# EAGLE board power distribution pcb (EAGLE 6.2)
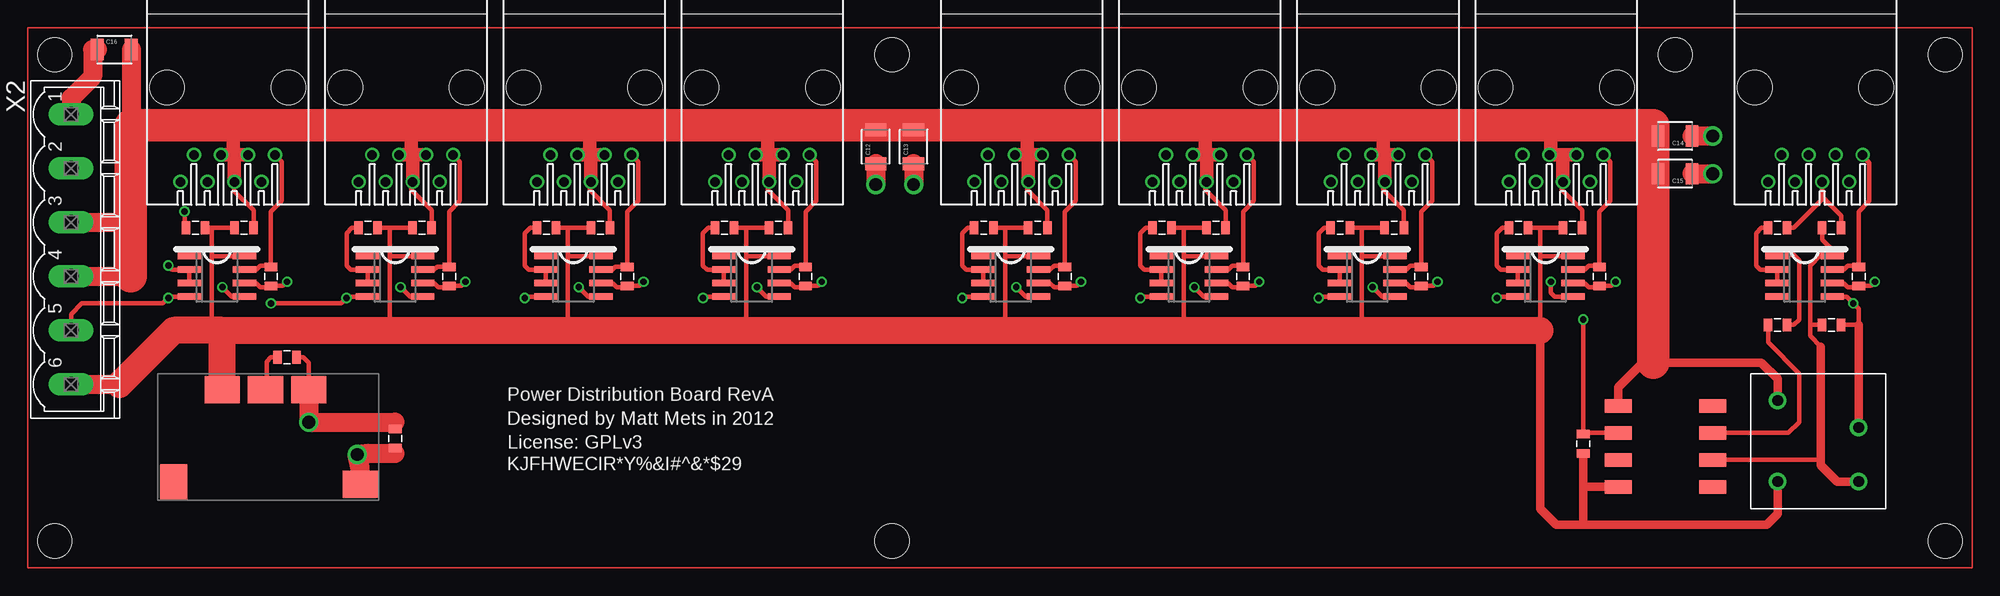
[diagram p0: board, top side]
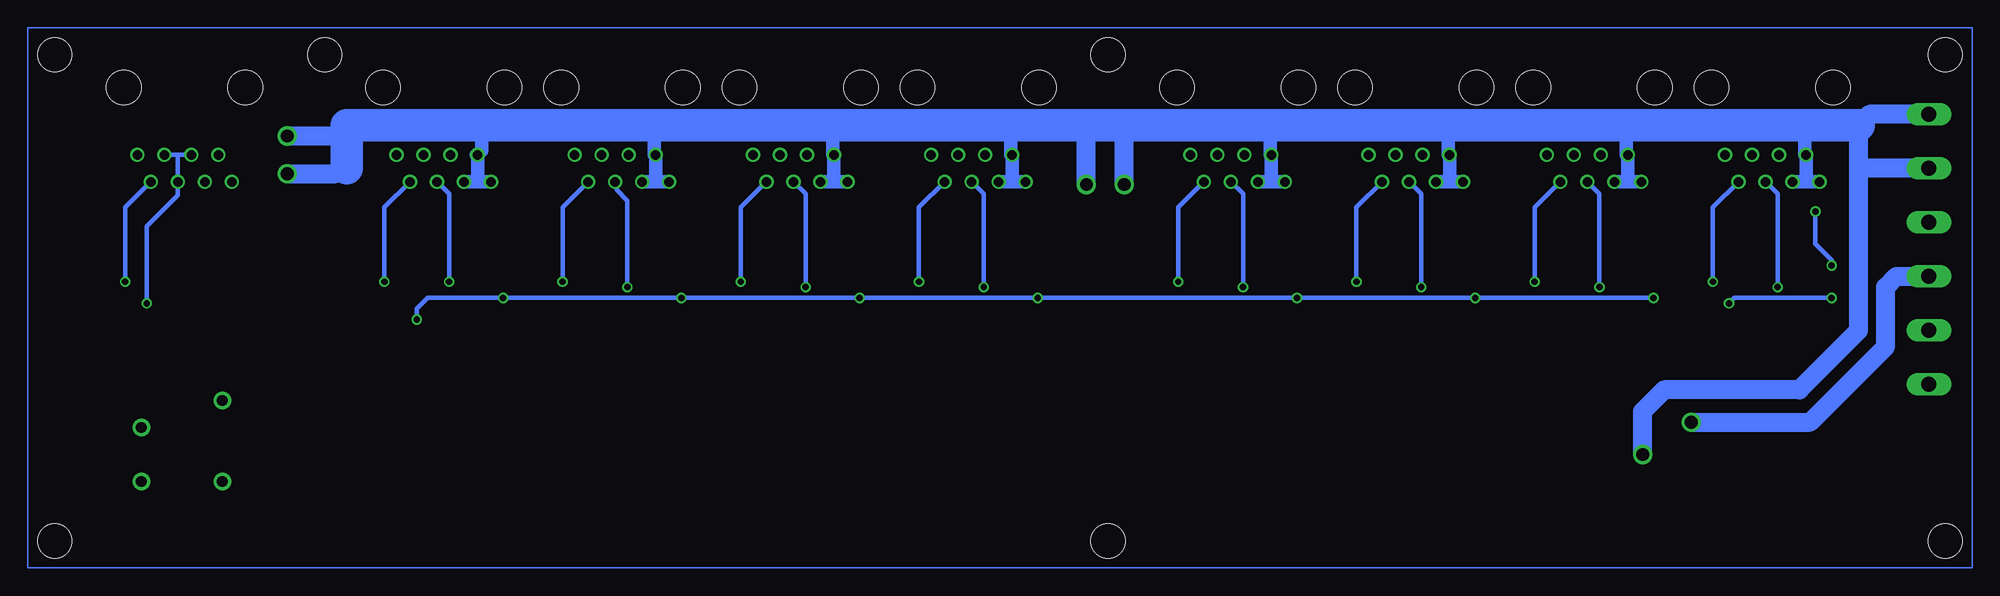
[diagram p1: board, bottom side, seen from below]

No outline drawn. Coordinates in mm, seen from the top.
Copper layers (1*16): Top 0.0356mm / dielectric 1.5011mm / Bottom 0.0356mm
Design rules: minimum track width 6mil, minimum drill 13mil, track to track 6mil, track to pad 6mil, pad to pad 6mil, via to via 6mil, smd to smd 6mil, copper to edge 15mil, drill to drill 6mil, minimum pad ring 7mil, minimum via ring 7mil, stop-mask expansion 4mil, vias tented up to drill 0mil, thermal gap 10mil
Net classes: 0 default: width 0.305 mm; 1 power: width 0.406 mm; 2 motors: width 0.61 mm
Holes 3.2 mm at 81.28,48.26 2.54,48.26 2.54,2.54 154.94,48.26 180.34,48.26 180.34,2.54 81.28,2.54

## Footprints (pad centres in the part's own frame; a part is rotated, then mirrored left to right if it is on the bottom)
0805 = smd 0.8 x 1.2: 1 -0.9,0; 2 0.9,0
1210 = smd 1.2 x 2: 1 -1.6,0; 2 1.6,0
SO08 = smd 0.6 x 2.2: 1 -1.905,-2.6; 2 -0.635,-2.6; 3 0.635,-2.6; 4 1.905,-2.6; 5 1.905,2.6; 6 0.635,2.6; 7 -0.635,2.6; 8 -1.905,2.6
520426-4 = drill 0.889: 1 -4.445,6.35; 2 -3.175,8.89; 3 -1.905,6.35; 4 -0.635,8.89; 5 0.635,6.35; 6 1.905,8.89; 7 3.175,6.35; 8 4.445,8.89 | hole 3.251: -5.715,0; 5.715,0
NME0505DC = drill 1.016 pad 1.651: P$1 0,0; P$4 7.62,0; P$5 7.62,7.62; P$7 2.54,7.62
OKI-T/3-W40N-C = smd 2.54 x 3.302: ENABLE 0,0 | smd 3.302 x 2.54: GROUND 12.7,8.636; TRIM 8.636,8.636; VIN 17.526,-0.254; VOUT 4.572,8.636
8_SOIC = smd 1.27 x 2.54: P$1 0,-2.54; P$2 2.54,-2.54; P$3 5.08,-2.54; P$4 7.62,-2.54; P$5 7.62,6.35; P$6 5.08,6.35; P$7 2.54,6.35; P$8 0,6.35
MSTBV6 = drill 1.397 long: 1 -12.7,0; 2 -7.62,0; 3 -2.54,0; 4 2.54,0; 5 7.62,0; 6 12.7,0

## Placement (x,y rotation side)
C1  100nF  [0805]  20.32,32 180 top
C2  100nF  [0805]  37.08,32 180 top
C3  100nF  [0805]  53.85,32 180 top
C4  100nF  [0805]  70.61,32 180 top
C5  100nF  [0805]  111.76,32 180 top
C6  100nF  [0805]  95,32 180 top
C7  100nF  [0805]  128.52,32 180 top
C8  100nF  [0805]  145.29,32 180 top
C9  100nF  [0805]  169.67,32 180 top
C10  ?F  [0805]  169.67,22.86 180 top
C11  ?F  [0805]  34.54,12.19 270 top
C12  [1210]  79.76,39.62 90 top
C13  [1210]  83.31,39.62 90 top
C14  [1210]  154.94,40.64 180 top
C15  [1210]  154.94,37.08 180 top
C16  [1210]  8.13,48.77 0 top
IC1  SN75176ASOIC  [SO08]  17.78,27.43 270 top
IC2  SN75176ASOIC  [SO08]  34.54,27.43 270 top
IC3  SN75176ASOIC  [SO08]  51.31,27.43 270 top
IC4  SN75176ASOIC  [SO08]  68.07,27.43 270 top
IC5  SN75176ASOIC  [SO08]  92.46,27.43 270 top
IC6  SN75176ASOIC  [SO08]  109.22,27.43 270 top
IC7  SN75176ASOIC  [SO08]  125.98,27.43 270 top
IC8  SN75176ASOIC  [SO08]  142.75,27.43 270 top
IC9  SN75176ASOIC  [SO08]  167.13,27.43 270 top
J1  [520426-4]  35.56,45.21 180 top
J2  [520426-4]  18.8,45.21 180 top
J3  [520426-4]  52.32,45.21 180 top
J4  [520426-4]  69.09,45.21 180 top
J5  [520426-4]  93.47,45.21 180 top
J6  [520426-4]  110.24,45.21 180 top
J7  [520426-4]  127,45.21 180 top
J8  [520426-4]  143.76,45.21 180 top
J9  [520426-4]  168.15,45.21 180 top
R1  180  [0805]  39.62,27.43 90 top
R2  10k  [0805]  32,32 0 top
R3  180  [0805]  22.86,27.43 90 top
R4  10k  [0805]  15.75,32 0 top
R5  180  [0805]  56.39,27.43 90 top
R6  10k  [0805]  48.77,32 0 top
R7  180  [0805]  73.15,27.43 90 top
R8  10k  [0805]  65.53,32 0 top
R9  180  [0805]  97.54,27.43 90 top
R10  10k  [0805]  89.92,32 0 top
R11  180  [0805]  114.3,27.43 90 top
R12  10k  [0805]  106.68,32 0 top
R13  180  [0805]  131.06,27.43 90 top
R14  10k  [0805]  123.44,32 0 top
R15  180  [0805]  147.83,27.43 90 top
R16  10k  [0805]  140.21,32 0 top
R17  180  [0805]  172.21,27.43 90 top
R18  10k  [0805]  164.59,32 0 top
R19  470  [0805]  164.59,22.86 0 top
R20  470  [0805]  146.3,11.68 270 top
R21  1.472k  [0805]  24.38,19.81 180 top
U$1  NME0505DC  [NME0505DC]  164.59,15.75 270 top
U$2  OKI-T/3-W40N-C  [OKI-T/3-W40N-C]  13.72,8.13 0 top
U$3  6N137  [8_SOIC]  155.96,7.62 90 top
X2  MSTBV6  [MSTBV6]  4.06,29.97 270 top

## Library data of the parts
C1-C16 R1-R21 = SparkFun
IC1-IC9 = reprap
J1-J9 = con-amp
U$1-U$3 = sonos_library
X2 = con-phoenix-508; MPN: MSTBV 2,5/6-GF-5.08; OC_FARNELL: 1792796; OC_NEWARK: 69R9849

## Nets
5V_ISO: C9.2 C10.2 IC9.8 U$1.P$5 U$3.P$2
D1: IC1.2 IC1.3 R4.1
D2: IC2.2 IC2.3 R2.1
D3: IC3.2 IC3.3 R6.1
D4: IC4.2 IC4.3 R8.1
D5: IC5.2 IC5.3 R10.1
D6: IC6.2 IC6.3 R12.1
D7: IC7.2 IC7.3 R14.1
D8: IC8.2 IC8.3 R16.1
D9: IC9.2 IC9.3 R18.1
GND [power]: C1.1 C2.1 C3.1 C4.1 C5.1 C6.1 C7.1 C8.1 C11.1 C12.2 C13.2 C14.2 C15.2 C16.2 IC1.5 IC2.5 IC3.5 IC4.5 IC5.5 IC6.5 IC7.5 IC8.5 J1.3 J1.4 J1.5 J2.3 J2.4 J2.5 J3.3 J3.4 J3.5 J4.3 J4.4 J4.5 J5.3 J5.4 J5.5 J6.3 J6.4 J6.5 J7.3 J7.4 J7.5 J8.3 J8.4 J8.5 R21.1 U$1.P$1 U$2.GROUND U$3.P$5 X2.3 X2.4
GND_ISO: C9.1 C10.1 IC9.5 J9.3 J9.4 J9.5 R18.2 U$1.P$7
N$1: R19.1 U$3.P$3
N$3: IC9.1 R19.2
N$9: R21.2 U$2.TRIM
RS485A1: IC1.6 J2.2 R3.1
RS485A2: IC2.6 J1.2 R1.1
RS485A3: IC3.6 J3.2 R5.1
RS485A4: IC4.6 J4.2 R7.1
RS485A5: IC5.6 J5.2 R9.1
RS485A6: IC6.6 J6.2 R11.1
RS485A7: IC7.6 J7.2 R13.1
RS485A8: IC8.6 J8.2 R15.1
RS485A9: IC9.6 J9.2 R17.1
RS485B1: IC1.7 J2.1 R3.2
RS485B2: IC2.7 J1.1 R1.2
RS485B3: IC3.7 J3.1 R5.2
RS485B4: IC4.7 J4.1 R7.2
RS485B5: IC5.7 J5.1 R9.2
RS485B6: IC6.7 J6.1 R11.2
RS485B7: IC7.7 J7.1 R13.2
RS485B8: IC8.7 J8.1 R15.2
RS485B9: IC9.7 J9.1 R17.2
TX: IC1.4 IC2.4 IC3.4 IC4.4 IC5.4 IC6.4 IC7.4 IC8.4 R20.1 U$3.P$6 X2.5
VCC: C1.2 C2.2 C3.2 C4.2 C5.2 C6.2 C7.2 C8.2 IC1.8 IC2.8 IC3.8 IC4.8 IC5.8 IC6.8 IC7.8 IC8.8 R2.2 R4.2 R6.2 R8.2 R10.2 R12.2 R14.2 R16.2 R20.2 U$1.P$4 U$2.VOUT U$3.P$8 X2.6
VMOT: C11.2 C12.1 C13.1 C14.1 C15.1 C16.1 J1.6 J1.7 J1.8 J2.6 J2.7 J2.8 J3.6 J3.7 J3.8 J4.6 J4.7 J4.8 J5.6 J5.7 J5.8 J6.6 J6.7 J6.8 J7.6 J7.7 J7.8 J8.6 J8.7 J8.8 U$2.VIN X2.1 X2.2

## Tracks (layer width: path | path; a pad name or v marks a point on that pad's centre or on a via)
5V_ISO
  Top 0.406: 167.64,22.86 167.64,28.45 168.66,29.46 169.6,29.46 IC9.8 169.67,29.4 169.67,29.97 168.77,30.87 C9.2 | C10.2 167.64,22.86 | U$3.P$2 168.66,10.16 | 167.64,22.86 167.64,21.84 168.66,20.83
  Top 0.813: U$1.P$5 170.18,8.13 168.66,9.65 168.66,10.16 168.66,20.83
D1  (via drill 0.6)
  Top 0.406: IC1.3 IC1.2 13.59,28.07 v13.21,28.45 | v14.73,33.53 14.73,32.12 R4.1
  Bottom 0.406: v13.21,28.45 13.21,28.96 14.73,30.48 v14.73,33.53
D2
  Top 0.406: IC2.3 IC2.2 30.35,28.07 29.97,28.45 29.97,31.5 30.48,32 R2.1
D3
  Top 0.406: IC3.3 IC3.2 47.12,28.07 46.74,28.45 46.74,31.5 47.24,32 R6.1
D4
  Top 0.406: IC4.3 IC4.2 63.88,28.07 63.5,28.45 63.5,31.5 64.01,32 R8.1
D5
  Top 0.406: IC5.3 IC5.2 88.27,28.07 87.88,28.45 87.88,31.5 88.39,32 R10.1
D6
  Top 0.406: IC6.3 IC6.2 105.03,28.07 104.65,28.45 104.65,31.5 105.16,32 R12.1
D7
  Top 0.406: IC7.3 IC7.2 121.79,28.07 121.41,28.45 121.41,31.5 121.92,32 R14.1
D8
  Top 0.406: IC8.3 IC8.2 138.56,28.07 138.18,28.45 138.18,31.5 138.68,32 R16.1
D9
  Top 0.406: IC9.3 IC9.2 162.94,28.07 162.56,28.45 162.56,31.5 163.07,32 R18.1
GND  (via drill 0.6, 1.2 pad 0.2)
  Top 0.406: J2.4 19.43,35.43 21.22,33.64 C1.1 | C2.1 37.98,33.64 36.07,35.56 36.07,36.2 J1.4 | C3.1 54.75,33.64 52.83,35.56 52.83,36.2 J3.4 | C4.1 71.51,33.64 69.6,35.56 69.6,36.2 J4.4 | C6.1 95.9,33.64 93.98,35.56 93.98,36.2 J5.4 | C5.1 112.66,33.64 110.74,35.56 110.74,36.2 J6.4 | C8.1 146.19,33.64 144.27,35.56 144.27,36.2 J8.4 | C7.1 129.42,33.64 127.51,35.56 127.51,36.2 J7.4 | IC7.5 127.38,25.53 v126.49,26.42 | IC3.5 52.7,25.53 v51.82,26.42 | IC6.5 110.62,25.53 v109.73,26.42 | IC5.5 93.85,25.53 v92.96,26.42 | IC4.5 69.47,25.53 v68.58,26.42 | IC2.5 35.94,25.53 v35.05,26.42 | IC1.5 19.18,25.53 v18.29,26.42 | IC8.5 143.64,25.53 143.26,25.91 v143.26,26.92 | U$2.GROUND 26.42,19.3 25.91,19.81 R21.1 | C12.2 80.85,41.22 81.28,41.66 | C13.2 82.22,41.22 81.79,41.66
  Top 0.508: 34.54,13.72 C11.1
  Top 0.813: U$1.P$1 164.59,17.78 163.07,19.3 152.91,19.3 151.89,19.3 149.61,17.02 U$3.P$5
  Top 1.27: 143.26,41.66 143.26,38.99 J8.5 144.27,38.86 | J8.3 144.27,38.86 | J8.4 144.4,38.73 144.27,38.86 | 127.64,38.86 J7.3 127.51,38.86 127.51,41.66 | 127.64,38.86 J7.4 | J7.5 127.64,38.86 | 110.87,38.86 J6.5 110.74,38.86 110.74,41.66 | 110.87,38.86 J6.4 | J6.3 110.87,38.86 | J5.5 94.11,38.86 | 94.11,38.86 J5.4 | 94.11,38.86 J5.3 93.98,38.86 93.98,41.66 | 69.72,38.86 J4.5 69.6,38.86 69.6,41.66 | 69.72,38.86 J4.4 | J4.3 69.72,38.86 | J3.5 52.96,38.86 | 52.96,38.86 J3.4 | 52.96,38.86 J3.3 52.83,38.86 52.83,41.66 | J1.5 36.2,38.86 | 36.2,38.86 J1.4 | 36.2,38.86 J1.3 36.07,38.86 36.07,41.66 | J2.3 19.43,38.86 | 19.43,38.86 J2.4 | 19.43,38.86 J2.5 19.3,38.86 19.3,41.66
  Top 1.778: U$2.GROUND v26.42,13.72 34.54,13.72 | C14.2 153.34,40.72 152.91,41.15 | C15.2 153.34,37.67 152.91,38.1 | C16.2 9.73,41.73 9.65,41.66 | X2.3 9.65,32.51 | X2.4 9.65,27.43
  Top 3.048: 152.91,19.3 152.91,38.1 152.91,41.15 152.91,41.66 143.26,41.66 127.51,41.66 110.74,41.66 93.98,41.66 81.79,41.66 81.28,41.66 69.6,41.66 52.83,41.66 36.07,41.66 19.3,41.66 9.65,41.66 9.65,32.51 9.65,27.43
  Bottom 0.406: v126.49,26.42 126.49,34.54 127.51,35.56 127.51,36.2 J7.4 | v51.82,26.42 51.82,35.18 J3.4 | v109.73,26.42 109.73,35.18 J6.4 | v92.96,26.42 92.96,35.18 J5.4 | v68.58,26.42 68.58,35.18 J4.4 | v35.05,26.42 35.05,35.18 J1.4 | v18.29,26.42 18.29,35.18 J2.4 | v143.26,26.92 143.26,35.18 J8.4
  Bottom 1.778: v26.42,13.72 15.24,13.72 8.13,20.83 8.13,26.42 7.11,27.43 X2.4
GND_ISO  (via drill 0.6)
  Top 0.406: C9.1 170.57,33.14 168.78,34.92 J9.4 168.78,34.67 166.12,32 R18.2 | 169.67,25.47 IC9.5 171.07,25.53 v171.7,24.89 172.21,24.38 172.21,22.86 C10.1
  Top 0.813: U$1.P$7 172.21,22.86
  Bottom 0.406: J9.5 J9.3 168.78,38.86 J9.4 168.78,35.05 171.7,32.13 v171.7,24.89
  Bottom 0.813: 171.96,12.95 U$1.P$7
N$1
  Top 0.406: R19.1 163.69,21.22 166.62,18.29 166.62,13.72 165.61,12.7 U$3.P$3
N$3
  Top 0.406: R19.2 166.12,22.86 166.62,23.37 166.62,28.96 166.12,29.46 164.66,29.46 IC9.1
N$7
  Top 0.127: 0,0 0,50.8 182.88,50.8 182.88,0 0,0
  Bottom 0.127: 182.88,50.8 0,50.8 0,0 182.88,0 182.88,50.8
N$9
  Top 0.406: U$2.TRIM 22.47,16.88 22.47,19.42 22.86,19.81 R21.2
RS485A1  (via drill 0.6)
  Top 0.406: IC1.6 21.46,26.8 21.84,26.42 22.74,26.42 R3.1 23.99,26.53 v24.38,26.92
  Bottom 0.406: J2.2 24.38,33.91 v24.38,26.92
RS485A2  (via drill 0.6)
  Top 0.406: v41.15,26.92 40.76,26.53 R1.1 39.51,26.42 38.61,26.42 38.23,26.8 IC2.6
  Bottom 0.406: J1.2 41.15,33.91 v41.15,26.92
RS485A3  (via drill 0.6)
  Top 0.406: v57.91,26.92 57.52,26.53 R5.1 56.27,26.42 55.37,26.42 54.99,26.8 IC3.6
  Bottom 0.406: J3.2 57.91,33.91 v57.91,26.92
RS485A4  (via drill 0.6)
  Top 0.406: v74.68,26.92 74.28,26.53 R7.1 73.04,26.42 72.14,26.42 71.75,26.8 IC4.6
  Bottom 0.406: J4.2 74.68,33.91 v74.68,26.92
RS485A5  (via drill 0.6)
  Top 0.406: v99.06,26.92 98.67,26.53 R9.1 97.42,26.42 96.52,26.42 96.14,26.8 IC5.6
  Bottom 0.406: J5.2 99.06,33.91 v99.06,26.92
RS485A6  (via drill 0.6)
  Top 0.406: v115.82,26.92 115.43,26.53 R11.1 114.18,26.42 113.28,26.42 112.9,26.8 IC6.6
  Bottom 0.406: J6.2 115.82,33.91 v115.82,26.92
RS485A7  (via drill 0.6)
  Top 0.406: v132.59,26.92 132.2,26.53 R13.1 130.95,26.42 130.05,26.42 129.67,26.8 IC7.6
  Bottom 0.406: J7.2 132.59,33.91 v132.59,26.92
RS485A8  (via drill 0.6)
  Top 0.406: v149.35,26.92 148.96,26.53 R15.1 147.71,26.42 146.81,26.42 146.43,26.8 IC8.6
  Bottom 0.406: J8.2 149.35,33.91 v149.35,26.92
RS485A9  (via drill 0.6)
  Top 0.406: IC9.6 170.81,26.8 171.2,26.42 172.1,26.42 R17.1 173.34,26.53 v173.74,26.92
  Bottom 0.406: v173.74,26.92 173.74,33.91 J9.2
RS485B1
  Top 0.406: IC1.7 21.46,28.07 21.84,28.45 22.74,28.45 R3.2 22.86,33.53 23.88,34.54 23.88,38.23 J2.1
RS485B2
  Top 0.406: J1.1 40.64,38.23 40.64,34.54 39.62,33.53 R1.2 38.49,28.33 38.1,27.94 37.27,27.94 IC2.7
RS485B3
  Top 0.406: J3.1 57.4,38.23 57.4,34.54 56.39,33.53 R5.2 55.26,28.33 54.86,27.94 54.03,27.94 IC3.7
RS485B4
  Top 0.406: J4.1 74.17,38.23 74.17,34.54 73.15,33.53 R7.2 73.04,28.45 72.14,28.45 71.75,28.07 IC4.7
RS485B5
  Top 0.406: J5.1 98.55,38.23 98.55,34.54 97.54,33.53 R9.2 97.42,28.45 96.52,28.45 96.14,28.07 IC5.7
RS485B6
  Top 0.406: J6.1 115.32,38.23 115.32,34.54 114.3,33.53 R11.2 114.18,28.45 113.28,28.45 112.9,28.07 IC6.7
RS485B7
  Top 0.406: J7.1 132.08,38.23 132.08,34.54 131.06,33.53 R13.2 130.95,28.45 130.05,28.45 129.67,28.07 IC7.7
RS485B8
  Top 0.406: J8.1 148.84,38.23 148.84,34.54 147.83,33.53 R15.2 147.71,28.45 146.81,28.45 146.43,28.07 IC8.7
RS485B9
  Top 0.406: IC9.7 170.81,28.07 171.2,28.45 172.1,28.45 R17.2 172.21,33.53 173.23,34.54 173.23,38.1 172.59,38.73 J9.1
TX  (via drill 0.6)
  Top 0.406: IC1.4 13.34,25.53 v13.21,25.4 12.7,24.89 5.08,24.89 4.06,23.88 X2.5 | IC8.4 138.3,25.53 v138.18,25.4 | IC7.4 121.54,25.53 v121.41,25.4 | IC6.4 104.78,25.53 v104.65,25.4 | IC5.4 88.01,25.53 v87.88,25.4 | IC4.4 63.63,25.53 v63.5,25.4 | IC3.4 46.86,25.53 v46.74,25.4 | IC2.4 30.1,25.53 v29.97,25.4 29.46,24.89 v22.86,24.89 | v146.3,23.37 R20.1 146.42,12.7 U$3.P$6
  Bottom 0.406: v29.97,25.4 v46.74,25.4 v63.5,25.4 v87.88,25.4 v104.65,25.4 v121.41,25.4 v138.18,25.4 145.29,25.4 146.3,24.38 v146.3,23.37 | v13.21,25.4 22.35,25.4 v22.86,24.89
VCC
  Top 0.406: R4.2 17.27,32 | R2.2 34.04,32 | 34.04,32 C2.2 | C8.2 142.24,32 | 142.24,32 R16.2 | C7.2 125.48,32 | 125.48,32 R14.2 | 108.71,32 C5.2 | C6.2 91.95,32 | 91.95,32 R10.2 | C4.2 67.56,32 | C3.2 50.8,32 | 50.8,32 R6.2 | IC1.8 17.27,29.34 | 17.27,29.34 17.27,22.35 | C1.2 17.27,32 | 17.27,32 17.27,29.34 | 34.04,29.34 34.04,32 | IC2.8 34.04,29.34 | 34.04,29.34 34.04,22.35 | 50.8,29.34 50.8,32 | IC3.8 50.8,29.34 | 50.8,29.34 50.8,22.35 | IC4.8 67.56,29.34 | 67.56,29.34 67.56,32 | R8.2 67.56,32 | 67.56,29.34 67.56,22.35 | 91.95,29.34 91.95,32 | IC5.8 91.95,29.34 | 91.95,29.34 91.95,22.35 | IC6.8 108.71,29.34 | 108.71,29.34 108.71,32 | R12.2 108.71,32 | 108.71,29.34 108.71,22.35 | 125.48,29.34 125.48,32 | IC7.8 125.48,29.34 | 125.48,29.34 125.48,22.35 | IC8.8 142.24,29.34 | 142.24,29.34 142.24,32 | 142.24,29.34 142.24,22.35
  Top 0.813: U$1.P$4 164.59,5.08 163.58,4.06 146.3,4.06 | 146.3,4.06 143.76,4.06 142.24,5.59 142.24,22.35 | 146.3,7.62 146.3,4.06 | R20.2 146.3,7.62 | U$3.P$8 146.3,7.62
  Top 1.778: X2.6 8.64,17.27
  Top 2.54: 18.29,22.35 34.04,22.35 50.8,22.35 67.56,22.35 91.95,22.35 108.71,22.35 125.48,22.35 142.24,22.35 | U$2.VOUT 18.29,22.35 | 18.29,22.35 17.27,22.35 13.72,22.35 8.64,17.27
VMOT  (via drill 1.2 pad 0.2)
  Top 0.508: 34.54,10.78 C11.2
  Top 1.778: U$2.VIN 31.24,9.4 v30.99,10.67 32.12,10.78 34.54,10.78 | C12.1 v79.76,36.07 | C13.1 v83.31,36.07 | C14.1 v158.5,40.64 | C15.1 v158.5,37.08 | C16.1 6.1,48.77 6.1,46.23 4.06,44.2 X2.1
  Bottom 1.27: 140.21,41.66 140.21,39.24 J8.7 | J8.8 J8.6 140.59,36.32 J8.7 | J8.7 140.72,38.86 | J5.8 J5.6 90.3,36.32 J5.7 90.42,38.86 90.42,41.66 | J4.8 J4.6 65.91,36.32 J4.7 66.04,38.86 66.04,41.66 | 49.28,41.66 49.28,38.86 J3.7 49.15,36.32 J3.6 J3.8 | J1.8 J1.6 32.38,36.32 J1.7 32.51,38.86 32.51,41.66 | J2.8 15.62,36.32 | 15.62,36.32 J2.7 15.75,38.86 15.75,41.66 | J2.6 15.62,36.32 | 11.68,41.15 11.68,41.66 | J6.8 J6.6 107.06,36.32 J6.7 107.19,38.86 107.19,41.66 | 123.95,41.66 123.95,38.86 J7.7 123.83,36.32 | J7.6 123.83,36.32 | J7.8 123.83,36.32
  Bottom 1.778: v30.99,10.67 30.99,14.73 28.96,16.76 16.26,16.76 10.67,22.35 10.67,37.59 | v79.76,36.07 79.76,41.66 | v83.31,36.07 83.31,41.66 | v158.5,40.64 152.91,40.64 152.91,41.15 | v158.5,37.08 153.92,37.08 152.91,37.59 | X2.1 9.65,42.67 10.67,41.66 10.67,37.59 | X2.2 10.67,37.59
  Bottom 3.048: 10.67,41.66 11.68,41.66 15.75,41.66 32.51,41.66 49.28,41.66 66.04,41.66 79.76,41.66 83.31,41.66 90.42,41.66 107.19,41.66 123.95,41.66 140.21,41.66 152.91,41.66 152.91,41.15 | 152.91,37.59 152.91,40.64

## Text on the board
tNames: Power Distribution Board RevA | Designed by Matt Mets in 2012 | License: GPLv3 | KJFHWECIR*Y%&I#^&*$29